# EAGLE board tr_1 (EAGLE 7.4.0)
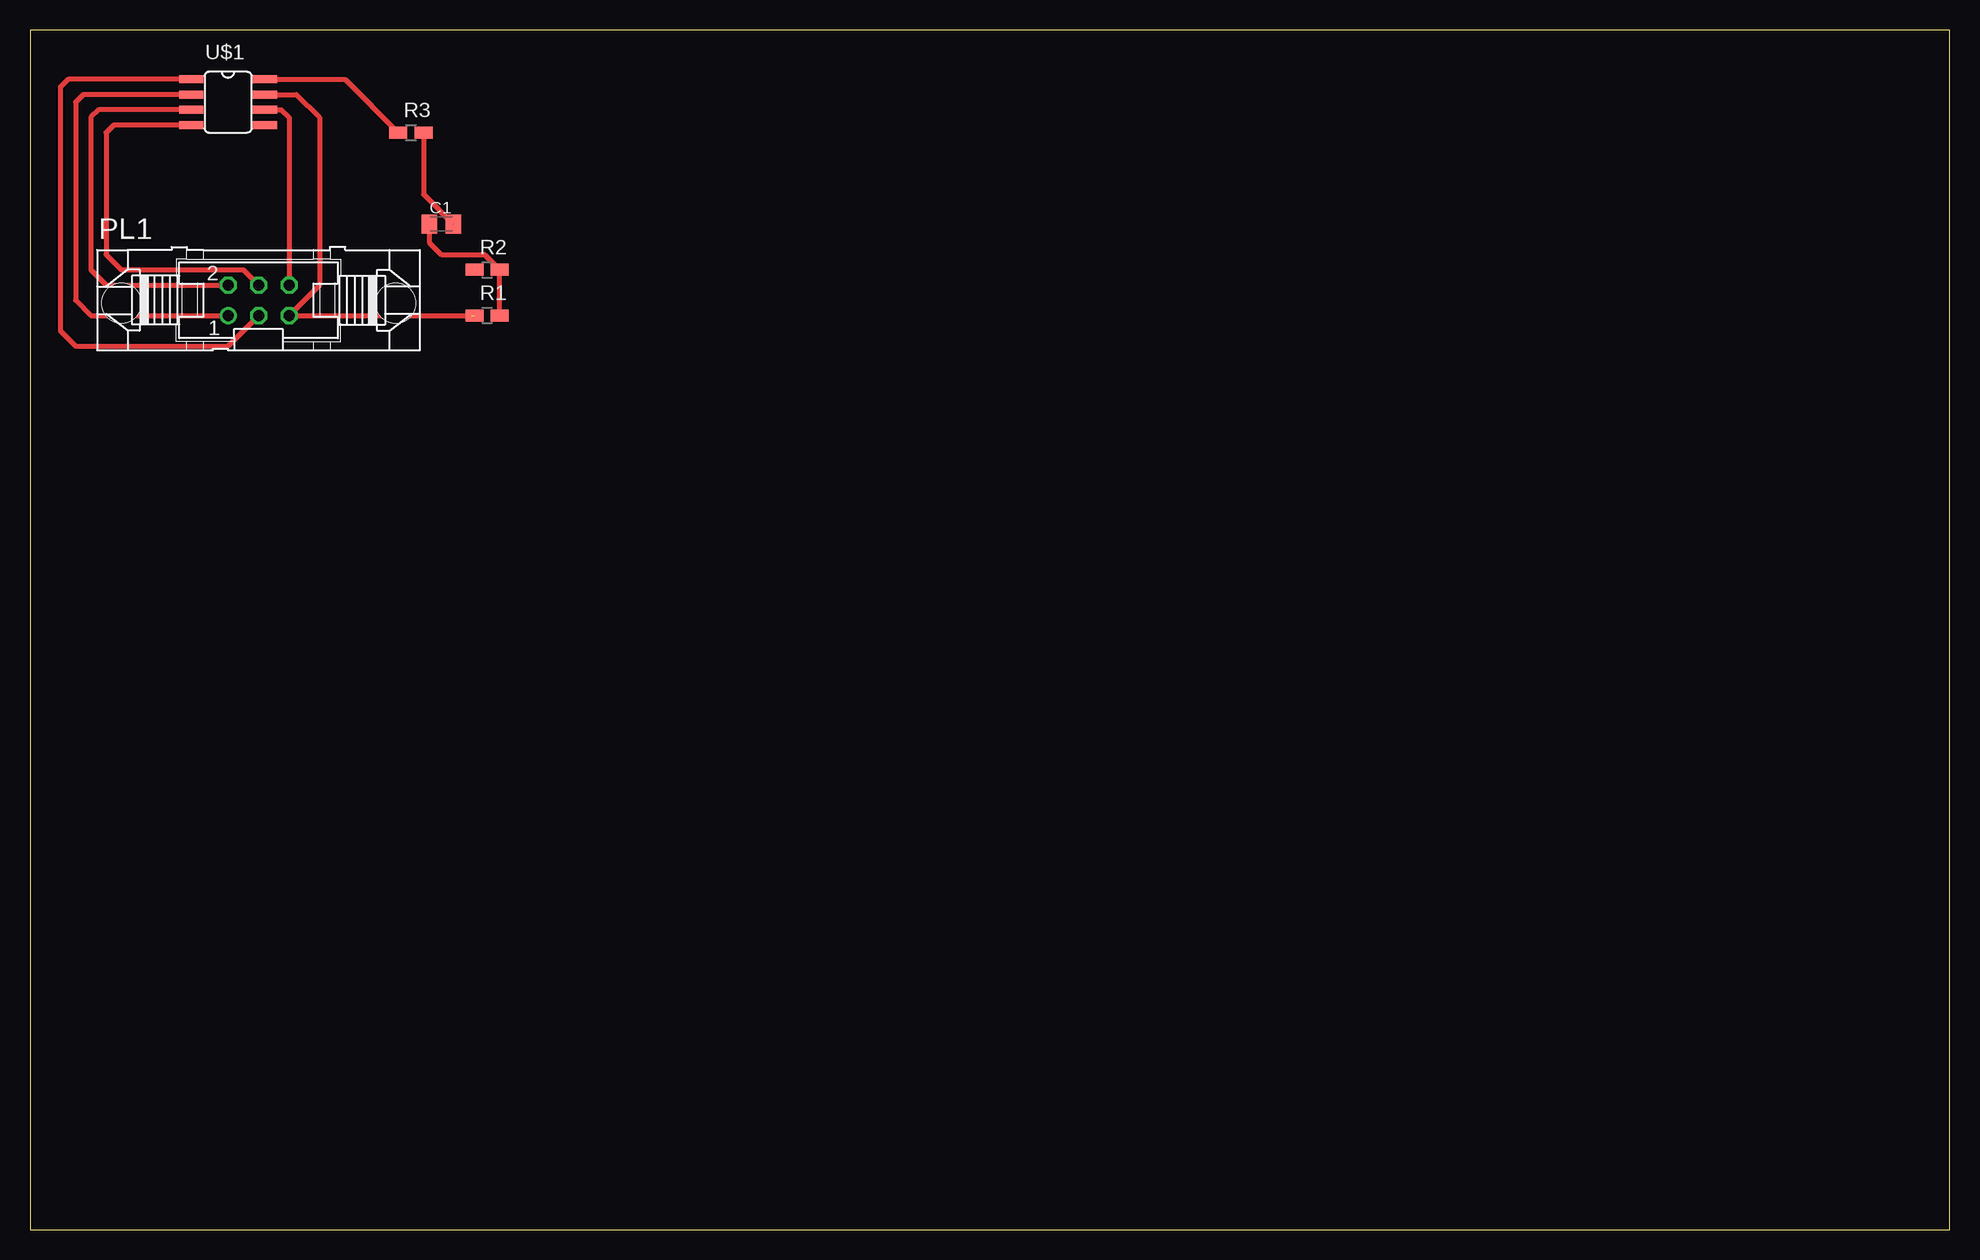
[diagram p0: board, top side]
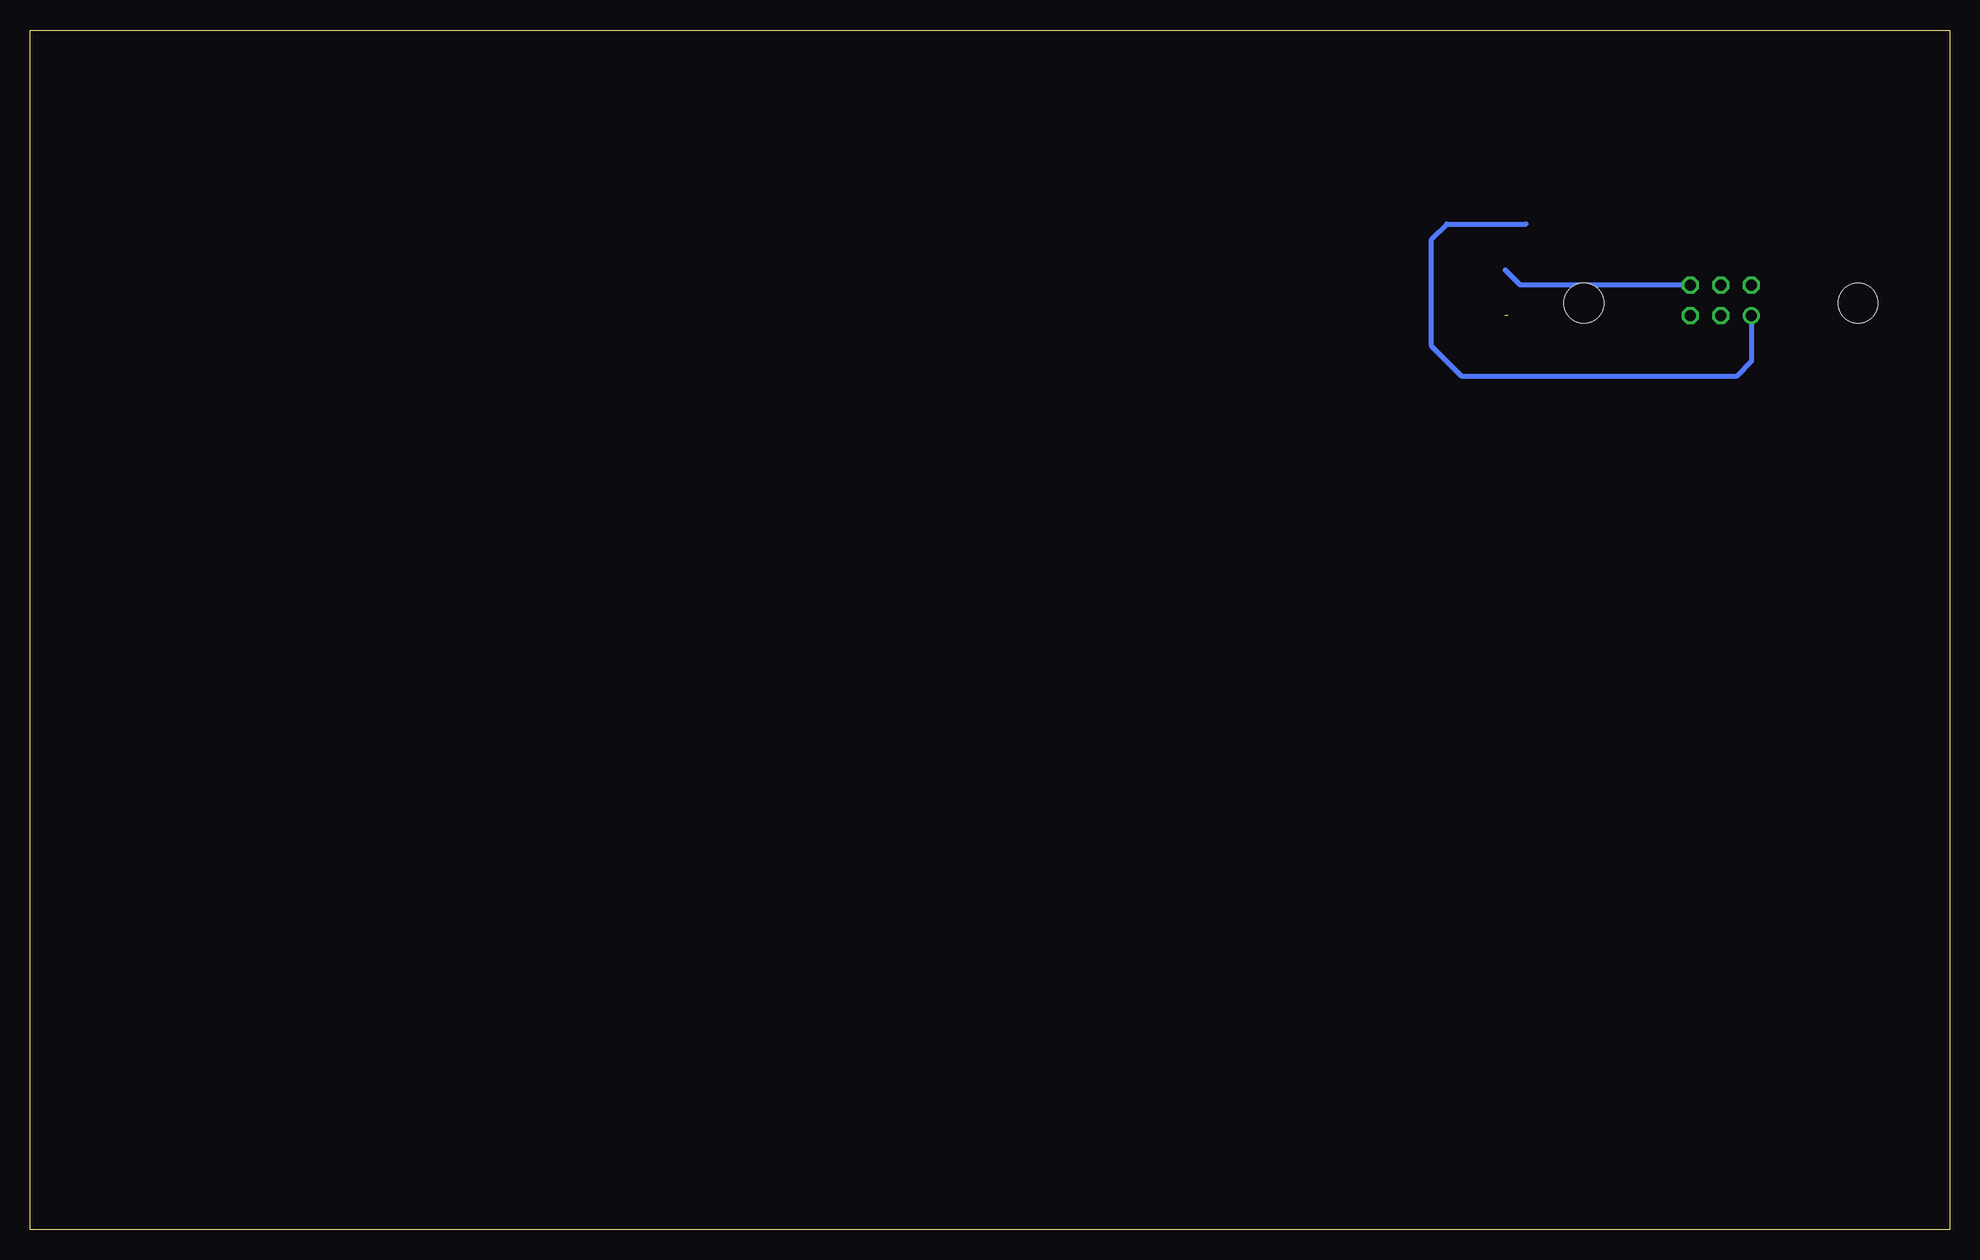
[diagram p1: board, bottom side, seen from below]

Size 160 x 100 mm. Coordinates in mm from the lower left corner, seen from the top.
Outline: 0,0 160,0 160,100 0,100 0,0
Copper layers (1*16): Top 0.035mm / dielectric 1.5mm / Bottom 0.035mm
Design rules "default": minimum track width 10mil, minimum drill 24mil, track to track 8mil, track to pad 8mil, pad to pad 8mil, via to via 8mil, smd to smd 8mil, copper to edge 40mil, drill to drill 8mil, minimum pad ring 10mil, minimum via ring 8mil, stop-mask expansion 4mil, vias tented up to drill 0mil, thermal gap 10mil

## Footprints (pad centres in the part's own frame; a part is rotated, then mirrored left to right if it is on the bottom)
C0805K = smd 1.3 x 1.6: 1 -1,0; 2 1,0
06V = drill 0.914: 1 -2.54,-1.27 | drill 0.914 octagon: 2 -2.54,1.27; 3 0,-1.27; 4 0,1.27; 5 2.54,-1.27; 6 2.54,1.27 | hole 3.302: 11.43,-0.254; -11.43,-0.254
R0805W = smd 1.5 x 1: 1 -1.052,0; 2 1.052,0
SO8 = smd 0.66 x 2.032: 1 -1.905,-3.073; 2 -0.635,-3.073; 3 0.635,-3.073; 4 1.905,-3.073; 5 1.905,3.073; 6 0.635,3.073; 7 -0.635,3.073; 8 -1.905,3.073

## Placement (x,y rotation side)
C1  [C0805K]  34.29,83.82 0 top
PL1  [06V]  19.05,77.47 0 top
R1  60E  [R0805W]  38.1,76.2 0 top
R2  60E  [R0805W]  38.1,80.01 0 top
R3  4.7k  [R0805W]  31.75,91.44 0 top
U$1  SN65HVD230/1  [SO8]  16.51,93.98 270 top

## Library data of the parts
C1 = rcl
PL1 = con-harting-v; OC_FARNELL: unknown; OC_NEWARK: unknown
R1-R3 = resistor
U$1 = texas_1

## Nets
CAN_H: PL1.5 R1.1 U$1.7
CAN_L: PL1.6 R2.1 U$1.6
CAN_RX: PL1.4 U$1.4
CAN_TX: PL1.3 U$1.1
GND: C1.2 PL1.1 R3.2 U$1.2
N$1: R3.1 U$1.8
N$4: C1.1 R1.2 R2.2
VCC: PL1.2 U$1.3

## Tracks (layer width: path | path; a pad name or v marks a point on that pad's centre or on a via)
CAN_H  (1 unrouted)
  Top 0.406: U$1.7 22.23,94.61 24.13,92.71 24.13,78.74 PL1.5 36.83,76.2
CAN_L  (1 unrouted)
  Top 0.406: U$1.6 20.95,93.34 21.59,92.71 PL1.6
  Bottom 0.406: PL1.6 35.78,78.74 R2.1
CAN_RX
  Top 0.406: U$1.4 6.99,92.08 6.35,91.44 6.35,81.28 7.62,80.01 17.78,80.01 PL1.4
CAN_TX
  Top 0.406: U$1.1 3.17,95.89 2.54,95.25 2.54,74.93 3.81,73.66 16.51,73.66 PL1.3
GND  (1 unrouted)
  Top 0.406: U$1.2 4.45,94.61 3.81,93.98 3.81,77.47 5.08,76.2 PL1.1 | R3.2 32.8,86.31 C1.2
  Bottom 0.406: PL1.1 16.51,72.39 17.78,71.12 40.64,71.12 43.18,73.66 43.18,82.55 41.91,83.82 C1.2
N$1
  Top 0.406: U$1.8 26.25,95.89 R3.1
N$4
  Top 0.406: R1.2 R2.2 37.88,81.28 34.29,81.28 33.29,82.28 C1.1
VCC
  Top 0.406: U$1.3 5.71,93.34 5.08,92.71 5.08,80.01 6.35,78.74 PL1.2